# Allegro board pc042a_toplevel_22.brd
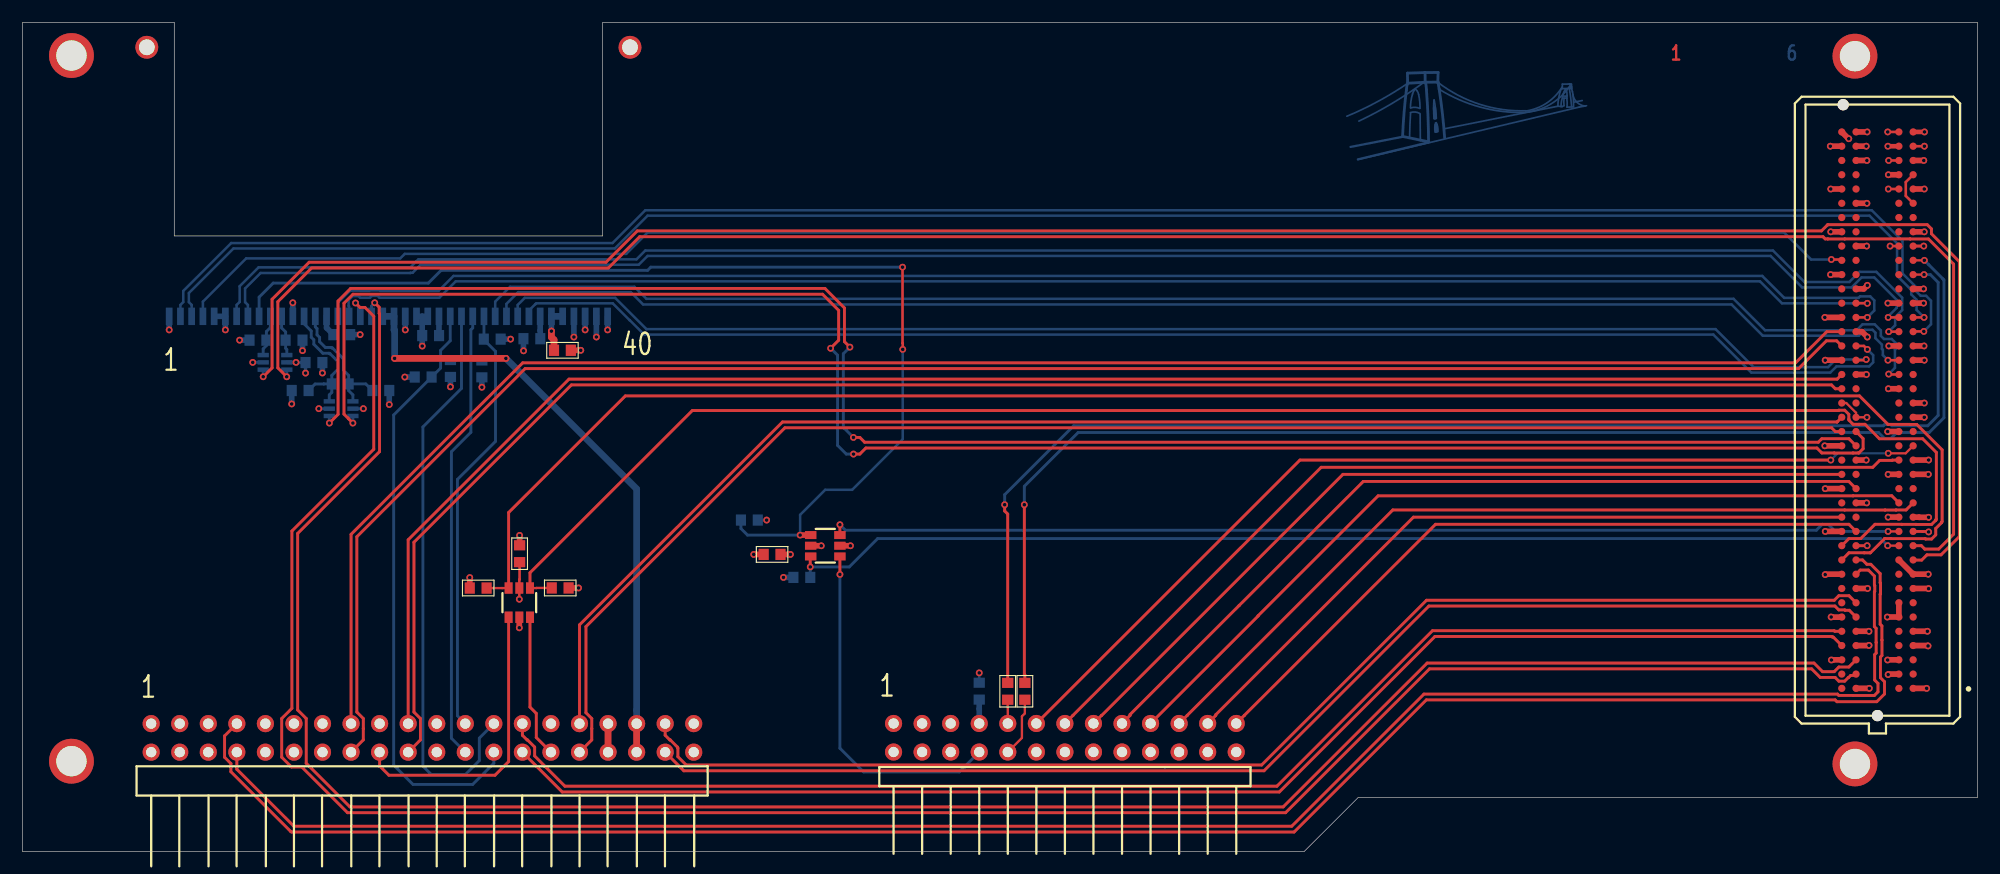
[diagram p0: board, top side]
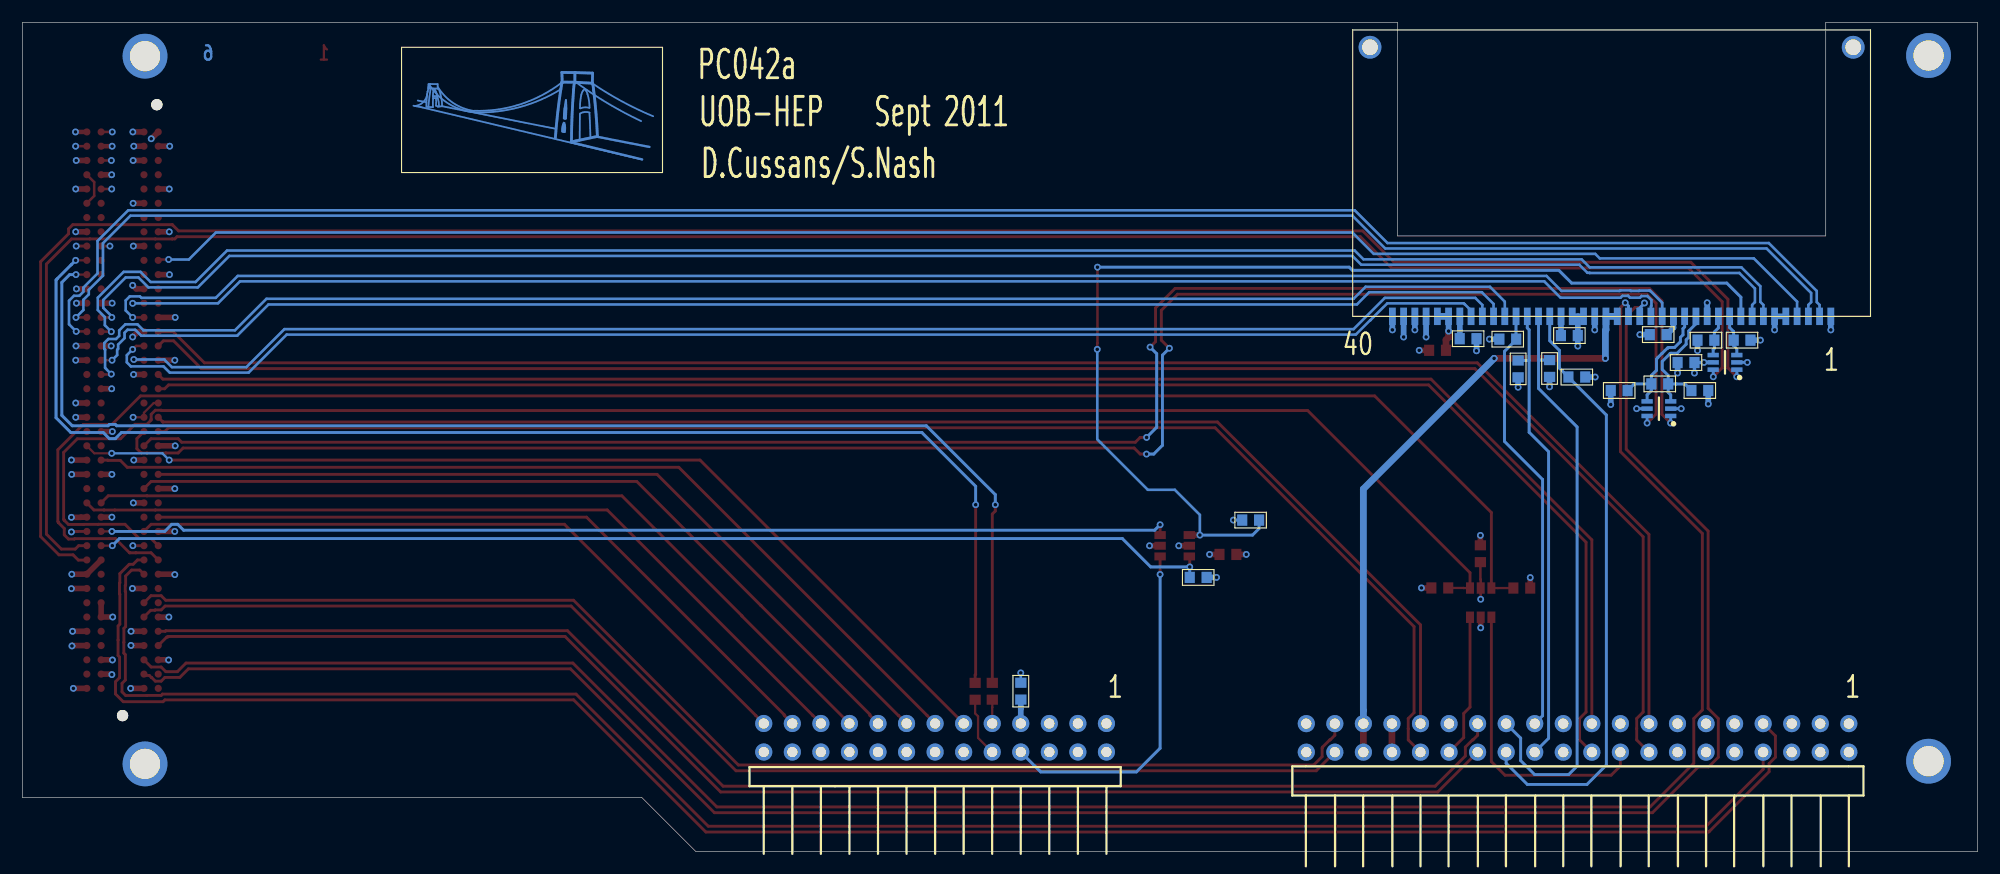
[diagram p1: board, bottom side, seen from below]

Outline 173.9 x 73.8 mm; copper layers: TOP, L2, L3, L4, L5, BOTTOM. Coordinates in mm from the lower left corner of the outline.
Outline path: 0,73.8 0,0 114,0 118.8,4.8 173.9,4.8 173.9,73.8 51.6,73.8 51.6,54.8 13.5,54.8 13.5,73.8 0,73.8

## Design rules (mm)
net group FMC_LA: nets FMC_LA<1> FMC_LA<2> FMC_LA<17> FMC_LA<18> FMC_LA<20> FMC_LA<24> FMC_LA<29> FMC_LA<30> FMC_LA<31> FMC_LA<32> FMC_LA<33> RDATA2 RDATA3 RDATA6 RDATA7
net group FMC_LA*: nets FMC_LA*<1> FMC_LA*<2> FMC_LA*<7> FMC_LA*<8> FMC_LA*<9> FMC_LA*<10> FMC_LA*<11> FMC_LA*<12> FMC_LA*<13> FMC_LA*<14> FMC_LA*<17> FMC_LA*<18> FMC_LA*<20> FMC_LA*<24> FMC_LA*<28> FMC_LA*<29> FMC_LA*<30> FMC_LA*<31> FMC_LA*<32> FMC_LA*<33>

## Placement (name value [footprint] x y rotation side)
C3  100nF  [C0603]  48.03 44.62 180 top
C4  100nF  [C0603]  45.31 45.65 0 bottom
C5  100nF  [C0603]  36.3 45.93 0 bottom
C6  100nF  [C0603]  28.4 46.01 180 bottom
C7  1.0uF  [C0603]  66.68 26.45 0 top
C8  100nF  [C0603]  25.93 43.53 180 bottom
C9  1.0uF  [C0603]  44.22 26.51 270 top
IC1  -  [SOP65P210X110-6N]  28.34 39.42 0 bottom
IC2  -  [SOP65P210X110-6N]  22.46 43.54 0 bottom
J1  -  [CONHE13C2X20M]  11.45 11.39 90 bottom
J2  -  [CONHE13C2X13M]  77.48 11.4 270 bottom
J3  -  [SAMTEC_ASP-134606-01]  165 39.29 270 top
LK1  -  [FXG_M2-7]  163 70.8 0 top
LK2  -  [FXG_M2-7]  163 7.8 0 top
LK3  -  [FXG_M2-7]  4.36 8.04 0 top
LK4  -  [FXG_M2-7]  4.36 70.86 0 top
NOREF  -  []  -15.12 -78.05 0 top
NOREF#2  -  []  128.6 65.3 0 top
NOREF#3  -  []  -0.03 0.01 89.9 top
NOREF#4  -  []  173.9 4.8 90 top
NOREF#5  -  []  0.03 73.8 0 top
R1  100  [C0603]  28.26 41.62 180 bottom
R2  390  [C0603]  31.87 41.04 0 bottom
R3  390  [C0603]  24.7 41.04 180 bottom
R4  10k  [C0603]  35.64 42.24 180 bottom
R5  10k  [C0603]  38.07 43 270 bottom
R6  10k  [C0603]  40.86 42.96 270 bottom
R7  10k  [C0603]  41.79 45.61 0 bottom
R8  00  [C0603]  85.1 14.28 90 bottom
R9  00  [C0603]  89.16 14.26 90 top
R10  00  [C0603]  87.63 14.26 90 top
R11  1k  [C0603]  69.32 24.4 180 bottom
R12  1k  [C0603]  40.54 23.45 180 top
R13  1k  [C0603]  47.83 23.46 0 top
R14  1k  [C0603]  64.66 29.5 0 bottom
R15  24  [C0603]  24.16 45.52 180 bottom
R16  24  [C0603]  20.95 45.52 0 bottom
U1  -  [SK_SAMTEC_MB1_140_01]  13.05 47.64 270 bottom
U2  -  [SOT23_6]  72.71 26.27 90 top
U3  -  [SOT23_6]  43.24 20.85 0 top

## Library data of the parts
C3-C6 C8 = CAPCERSMDCL2: part number: CAPCERSMDCL2_0603-100NF,16V; tolerance: 10%
C7 C9 = CAPCERSMDCL2: part number: CAPCERSMDCL2_0603-1.0UF,6.3V; tolerance: 10%
IC1 IC2 = ADCMP604: part number: ADCMP604BKSZ
J1 = CON40P: part number: CON40P-BARC2X20
J2 = CON26P: part number: CON26P-BARC2X13
J3 = CON160P_40CDGH: part number: ASP-134606-01
LK1-LK4 = 1-HOLE: part number: 1-HOLE_FXG2-7-BASE
R1 = RSMD0603: part number: RSMD0603_1/10W-100,1%; tolerance: 1%
R2 R3 = RSMD0603: part number: RSMD0603_1/10W-390,1%; tolerance: 1%
R4-R7 = RSMD0603: part number: RSMD0603_1/10W-10K,1%; tolerance: 1%
R8-R10 = RSMD0603: part number: RSMD0603_-00,
R11-R14 = RSMD0603: part number: RSMD0603_1/10W-1K,1%; tolerance: 1%
R15 R16 = RSMD0603: part number: RSMD0603_1/10W-24,1%; tolerance: 1%
U1 = SK-SAMTEC-40PIN-MB1: part number: SK-SAMTEC-40PIN-MB1_RT-SMT-SAMTEC
U2 U3 = SN74AUC2G07: part number: SN74AUC2G07_SOT-TI

## Footprints (pads in the part's own frame, mm; a bottom-side part is the same pattern mirrored in y, then rotated)
C0603
  rect 0.9x1 smd: 1(-0.75,0) 2(0.75,0)
CONHE13C2X13M
  round 1.524 hole 0.914: 1(0,0) 2(2.54,0) 3(0,-2.54) 4(2.54,-2.54) 5(0,-5.08) 6(2.54,-5.08) 7(0,-7.62) 8(2.54,-7.62) 9(0,-10.16) 10(2.54,-10.16) 11(0,-12.7) 12(2.54,-12.7) 13(0,-15.24) 14(2.54,-15.24) 15(0,-17.78) 16(2.54,-17.78) 17(0,-20.32) 18(2.54,-20.32) 19(0,-22.86) 20(2.54,-22.86) 21(0,-25.4) 22(2.54,-25.4) 23(0,-27.94) 24(2.54,-27.94) 25(0,-30.48) 26(2.54,-30.48)
CONHE13C2X20M
  round 1.524 hole 0.914: 1(0,0) 2(-2.54,0) 3(0,2.54) 4(-2.54,2.54) 5(0,5.08) 6(-2.54,5.08) 7(0,7.62) 8(-2.54,7.62) 9(0,10.16) 10(-2.54,10.16) 11(0,12.7) 12(-2.54,12.7) 13(0,15.24) 14(-2.54,15.24) 15(0,17.78) 16(-2.54,17.78) 17(0,20.32) 18(-2.54,20.32) 19(0,22.86) 20(-2.54,22.86) 21(0,25.4) 22(-2.54,25.4) 23(0,27.94) 24(-2.54,27.94) 25(0,30.48) 26(-2.54,30.48) 27(0,33.02) 28(-2.54,33.02) 29(0,35.56) 30(-2.54,35.56) 31(0,38.1) 32(-2.54,38.1) 33(0,40.64) 34(-2.54,40.64) 35(0,43.18) 36(-2.54,43.18) 37(0,45.72) 38(-2.54,45.72) 39(0,48.26) 40(-2.54,48.26)
FXG_M2-7
  round 3.988 hole 2.692: 1(0,0)
SAMTEC_ASP-134606-01
  round 1 hole 1.3 unplated: (-27.19,-3.05) (27.19,0)
  round 0.64 smd: C1(24.765,3.175) C2(23.495,3.175) C3(22.225,3.175) C4(20.955,3.175) C5(19.685,3.175) C6(18.415,3.175) C7(17.145,3.175) C8(15.875,3.175) C9(14.605,3.175) C10(13.335,3.175) C11(12.065,3.175) C12(10.795,3.175) C13(9.525,3.175) C14(8.255,3.175) C15(6.985,3.175) C16(5.715,3.175) C17(4.445,3.175) C18(3.175,3.175) C19(1.905,3.175) C20(0.635,3.175) C21(-0.635,3.175) C22(-1.905,3.175) C23(-3.175,3.175) C24(-4.445,3.175) C25(-5.715,3.175) C26(-6.985,3.175) C27(-8.255,3.175) C28(-9.525,3.175) C29(-10.795,3.175) C30(-12.065,3.175) C31(-13.335,3.175) C32(-14.605,3.175) C33(-15.875,3.175) C34(-17.145,3.175) C35(-18.415,3.175) C36(-19.685,3.175) C37(-20.955,3.175) C38(-22.225,3.175) C39(-23.495,3.175) C40(-24.765,3.175) D1(24.765,1.905) D2(23.495,1.905) D3(22.225,1.905) D4(20.955,1.905) D5(19.685,1.905) D6(18.415,1.905) D7(17.145,1.905) D8(15.875,1.905) D9(14.605,1.905) D10(13.335,1.905) D11(12.065,1.905) D12(10.795,1.905) D13(9.525,1.905) D14(8.255,1.905) D15(6.985,1.905) D16(5.715,1.905) D17(4.445,1.905) D18(3.175,1.905) D19(1.905,1.905) D20(0.635,1.905) D21(-0.635,1.905) D22(-1.905,1.905) D23(-3.175,1.905) D24(-4.445,1.905) D25(-5.715,1.905) D26(-6.985,1.905) D27(-8.255,1.905) D28(-9.525,1.905) D29(-10.795,1.905) D30(-12.065,1.905) D31(-13.335,1.905) D32(-14.605,1.905) D33(-15.875,1.905) D34(-17.145,1.905) D35(-18.415,1.905) D36(-19.685,1.905) D37(-20.955,1.905) D38(-22.225,1.905) D39(-23.495,1.905) D40(-24.765,1.905) G1(24.765,-1.905) G2(23.495,-1.905) G3(22.225,-1.905) G4(20.955,-1.905) G5(19.685,-1.905) G6(18.415,-1.905) G7(17.145,-1.905) G8(15.875,-1.905) G9(14.605,-1.905) G10(13.335,-1.905) G11(12.065,-1.905) G12(10.795,-1.905) G13(9.525,-1.905) G14(8.255,-1.905) G15(6.985,-1.905) G16(5.715,-1.905) G17(4.445,-1.905) G18(3.175,-1.905) G19(1.905,-1.905) G20(0.635,-1.905) G21(-0.635,-1.905) G22(-1.905,-1.905) G23(-3.175,-1.905) G24(-4.445,-1.905) G25(-5.715,-1.905) G26(-6.985,-1.905) G27(-8.255,-1.905) G28(-9.525,-1.905) G29(-10.795,-1.905) G30(-12.065,-1.905) G31(-13.335,-1.905) G32(-14.605,-1.905) G33(-15.875,-1.905) G34(-17.145,-1.905) G35(-18.415,-1.905) G36(-19.685,-1.905) G37(-20.955,-1.905) G38(-22.225,-1.905) G39(-23.495,-1.905) G40(-24.765,-1.905) H1(24.765,-3.175) H2(23.495,-3.175) H3(22.225,-3.175) H4(20.955,-3.175) H5(19.685,-3.175) H6(18.415,-3.175) H7(17.145,-3.175) H8(15.875,-3.175) H9(14.605,-3.175) H10(13.335,-3.175) H11(12.065,-3.175) H12(10.795,-3.175) H13(9.525,-3.175) H14(8.255,-3.175) H15(6.985,-3.175) H16(5.715,-3.175) H17(4.445,-3.175) H18(3.175,-3.175) H19(1.905,-3.175) H20(0.635,-3.175) H21(-0.635,-3.175) H22(-1.905,-3.175) H23(-3.175,-3.175) H24(-4.445,-3.175) H25(-5.715,-3.175) H26(-6.985,-3.175) H27(-8.255,-3.175) H28(-9.525,-3.175) H29(-10.795,-3.175) H30(-12.065,-3.175) H31(-13.335,-3.175) H32(-14.605,-3.175) H33(-15.875,-3.175) H34(-17.145,-3.175) H35(-18.415,-3.175) H36(-19.685,-3.175) H37(-20.955,-3.175) H38(-22.225,-3.175) H39(-23.495,-3.175) H40(-24.765,-3.175)
SK_SAMTEC_MB1_140_01
  round 2.032 hole 1.4: (-23.952,-40.99) (-23.952,1.99)
  rect 1.55x0.6 smd: 1(0,0) 2(0,-1) 3(0,-2) 4(0,-3) 5(0,-4) 6(0,-5) 7(0,-6) 8(0,-7) 9(0,-8) 10(0,-9) 11(0,-10) 12(0,-11) 13(0,-12) 14(0,-13) 15(0,-14) 16(0,-15) 17(0,-16) 18(0,-17) 19(0,-18) 20(0,-19) 21(0,-20) 22(0,-21) 23(0,-22) 24(0,-23) 25(0,-24) 26(0,-25) 27(0,-26) 28(0,-27) 29(0,-28) 30(0,-29) 31(0,-30) 32(0,-31) 33(0,-32) 34(0,-33) 35(0,-34) 36(0,-35) 37(0,-36) 38(0,-37) 39(0,-38) 40(0,-39)
SOP65P210X110-6N
  rect 1x0.4 smd: 1(-1.05,0.65) 2(-1.05,0) 3(-1.05,-0.65) 4(1.05,-0.65) 5(1.05,0) 6(1.05,0.65)
SOT23_6
  rect 0.711x1.016 smd: 1(0,0) 2(0.95,0) 3(1.9,0) 4(1.9,2.6) 5(0.95,2.6) 6(0,2.6)

## Nets
GND_SIGNAL: C3.1(A<0>) C4.1(A<0>) C5.1(A<0>) C6.1(A<0>) C7.1(A<0>) C8.1(A<0>) C9.1(A<0>) IC1.2(VEE) IC2.2(VEE) J1.2(A<1>) J1.5(A<4>) J1.6(A<5>) J1.9(A<8>) J1.10(A<9>) J1.13(A<12>) J1.14(A<13>) J2.6(A<5>) J2.12(A<11>) J2.14(A<13>) J2.16(A<15>) J2.18(A<17>) J2.20(A<19>) J2.22(A<21>) J2.24(A<23>) J2.26(A<25>) J3.C1(C<1>) J3.C4(C<4>) J3.C5(C<5>) J3.C8(C<8>) J3.C9(C<9>) J3.C12(C<12>) J3.C13(C<13>) J3.C16(C<16>) J3.C17(C<17>) J3.C20(C<20>) J3.C21(C<21>) J3.C24(C<24>) J3.C25(C<25>) J3.C28(C<28>) J3.C29(C<29>) J3.C32(C<32>) J3.C33(C<33>) J3.C36(C<36>) J3.C38(C<38>) J3.C40(C<40>) J3.D2(D<2>) J3.D3(D<3>) J3.D6(D<6>) J3.D7(D<7>) J3.D10(D<10>) J3.D13(D<13>) J3.D16(D<16>) J3.D19(D<19>) J3.D22(D<22>) J3.D25(D<25>) J3.D28(D<28>) J3.D37(D<37>) J3.D39(D<39>) J3.G1(G<1>) J3.G4(G<4>) J3.G5(G<5>) J3.G8(G<8>) J3.G11(G<11>) J3.G14(G<14>) J3.G17(G<17>) J3.G20(G<20>) J3.G23(G<23>) J3.G26(G<26>) J3.G29(G<29>) J3.G32(G<32>) J3.G35(G<35>) J3.G38(G<38>) J3.G40(G<40>) J3.H3(H<3>) J3.H6(H<6>) J3.H9(H<9>) J3.H12(H<12>) J3.H15(H<15>) J3.H18(H<18>) J3.H21(H<21>) J3.H24(H<24>) J3.H27(H<27>) J3.H30(H<30>) J3.H33(H<33>) J3.H36(H<36>) J3.H39(H<39>) LK1.1(A<0>) LK2.1(A<0>) LK3.1(A<0>) LK4.1(A<0>) R15.1(A<0>) R16.1(A<0>) U1.1(A<0>) U1.5(A<4>) U1.6(A<5>) U1.12(A<11>) U1.23(A<22>) U1.24(A<23>) U1.37(A<36>) U1.38(A<37>) U1.39(A<38>) U1.40(A<39>) U2.2 U3.2
P1V5A: J1.35(A<34>) J1.36(A<35>) U1.20(A<19>) U1.21(A<20>)
P2V5: C7.2(B<0>) C8.2(B<0>) IC2.5(VCC) J3.G39(G<39>) J3.H40(H<40>) R11.2(B<0>) R12.2(B<0>) R13.2(B<0>) U2.5
P3V3: C9.2(B<0>) J3.C39(C<39>) J3.D32(D<32>) J3.D36(D<36>) J3.D38(D<38>) J3.D40(D<40>) R8.2(B<0>) R14.2(B<0>) U3.5
P5V: J1.17(A<16>)
P12V: J3.C35(C<35>) J3.C37(C<37>)
A0: J1.23(A<22>) R7.1(A<0>) U1.29(A<28>)
A1: J1.24(A<23>) R6.1(A<0>) U1.28(A<27>)
A1+: J1.12(A<11>)
A1-: J1.11(A<10>)
A2: J1.25(A<24>) R5.1(A<0>) U1.27(A<26>)
A2+: J1.4(A<3>)
A2-: J1.3(A<2>)
A3: J1.26(A<25>) R4.1(A<0>) U1.26(A<25>)
BIAS: J1.40(A<39>)
BIAS_GND: J1.39(A<38>)
CA1+: IC2.3(+IN) R16.2(B<0>) U1.10(A<9>)
CA1-: IC2.4(-IN) R15.2(B<0>) U1.11(A<10>)
CCLK_ROC+: J3.G2(G<2>) U1.18(A<17>)
CCLK_ROC-: J3.G3(G<3>) U1.19(A<18>)
CCLK_SEL: J3.H31(H<31>) U1.4(A<3>)
CCTR+: J3.G27(G<27>) U1.16(A<15>)
CCTR-: J3.G28(G<28>) U1.17(A<16>)
CI2C_CLK+: J3.C26(C<26>) U1.2(A<1>)
CI2C_CLK-: J3.C27(C<27>) U1.3(A<2>)
CI2C_DAT+: J3.D23(D<23>) U1.30(A<29>)
CI2C_DAT-: J3.D24(D<24>) U1.31(A<30>)
CRESET*: R14.1(A<0>) U1.9(A<8>) U2.4(Y)
CTIN+: J3.D26(D<26>) U1.7(A<6>)
CTIN-: J3.D27(D<27>) U1.8(A<7>)
CTOUT+: J3.G24(G<24>) U1.32(A<31>)
CTOUT-: J3.G25(G<25>) U1.33(A<32>)
CTRIGOUT+: IC1.3(+IN) R1.2(B<0>) R3.1(A<0>) U1.13(A<12>)
CTRIGOUT-: IC1.4(-IN) R1.1(A<0>) R2.1(A<0>) U1.14(A<13>)
DP0_C2M: J3.C2(C<2>)
DP0_C2M*: J3.C3(C<3>)
DP0_M2C: J3.C6(C<6>)
DP0_M2C*: J3.C7(C<7>)
FA1+: IC2.1(Q) J3.C10(C<10>)
FA1-: IC2.6(Q*) J3.C11(C<11>)
FCLK_SEL_IN: J3.H10(H<10>) R12.1(A<0>) U3.6(Y)
FMC_LA*<1>: J3.D9(D<9>)
FMC_LA*<2>: J3.H8(H<8>)
FMC_LA*<7>: J3.H14(H<14>)
FMC_LA*<8>: J3.G13(G<13>)
FMC_LA*<9>: J3.D15(D<15>)
FMC_LA*<10>: J3.C15(C<15>)
FMC_LA*<11>: J3.H17(H<17>)
FMC_LA*<12>: J3.G16(G<16>)
FMC_LA*<13>: J3.D18(D<18>)
FMC_LA*<14>: J3.C19(C<19>)
FMC_LA*<17>: J3.D21(D<21>)
FMC_LA*<18>: J3.C23(C<23>)
FMC_LA*<20>: J3.G22(G<22>)
FMC_LA*<24>: J3.H29(H<29>)
FMC_LA*<28>: J3.H32(H<32>)
FMC_LA*<29>: J3.G31(G<31>)
FMC_LA*<30>: J3.H35(H<35>)
FMC_LA*<31>: J3.G34(G<34>)
FMC_LA*<32>: J3.H38(H<38>)
FMC_LA*<33>: J3.G37(G<37>)
FMC_LA<1>: J3.D8(D<8>)
FMC_LA<2>: J3.H7(H<7>)
FMC_LA<17>: J3.D20(D<20>)
FMC_LA<18>: J3.C22(C<22>)
FMC_LA<20>: J3.G21(G<21>)
FMC_LA<24>: J3.H28(H<28>)
FMC_LA<29>: J3.G30(G<30>)
FMC_LA<30>: J3.H34(H<34>)
FMC_LA<31>: J3.G33(G<33>)
FMC_LA<32>: J3.H37(H<37>)
FMC_LA<33>: J3.G36(G<36>)
FMC_PRSNT_M2C_L: J3.H2(H<2>)
FMC_PWR_GOOD_FLASH_RST_B: J3.D1(D<1>)
FMC_TCK_BUF: J3.D29(D<29>)
FMC_TDO: J3.D31(D<31>)
FMC_TMS_BUF: J3.D33(D<33>)
FPGA_TDO: J3.D30(D<30>)
FPON: J3.D11(D<11>) R11.1(A<0>) U2.6(Y)
FRESET_IN*: J3.H11(H<11>) R13.1(A<0>) U3.4(Y)
FRESET_OUT*: J3.D12(D<12>) U2.3(A)
FTRIGOUT+: IC1.1(Q) J3.G18(G<18>)
FTRIGOUT-: IC1.6(Q*) J3.G19(G<19>)
GA0: J3.C34(C<34>)
GA1: J3.D35(D<35>)
GBTCLK0_M2C: J3.D4(D<4>)
GBTCLK0_M2C*: J3.D5(D<5>)
IIC_SCL_MAIN: J3.C30(C<30>) R10.2(B<0>)
IIC_SDA_MAIN: J3.C31(C<31>) R9.2(B<0>)
RCLK_ROC+: J1.28(A<27>) J3.H4(H<4>)
RCLK_ROC-: J1.27(A<26>) J3.H5(H<5>)
RCLK_SEL: J1.18(A<17>) U3.1(A)
RCTR+: J1.32(A<31>) J3.H19(H<19>)
RCTR-: J1.31(A<30>) J3.H20(H<20>)
RDATA0: J2.11(A<10>) J3.C18(C<18>)
RDATA1: J2.13(A<12>) J3.D17(D<17>)
RDATA2: J2.15(A<14>) J3.H16(H<16>)
RDATA3: J2.17(A<16>) J3.G15(G<15>)
RDATA4: J2.19(A<18>) J3.D14(D<14>)
RDATA5: J2.21(A<20>) J3.C14(C<14>)
RDATA6: J2.23(A<22>) J3.H13(H<13>)
RDATA7: J2.25(A<24>) J3.G12(G<12>)
RI2C_CLK+: J1.22(A<21>)
RI2C_CLK-: J1.21(A<20>)
RI2C_DAT+: J1.38(A<37>) J3.G6(G<6>)
RI2C_DAT-: J1.37(A<36>) J3.G7(G<7>)
RPON: J2.8(A<7>) U2.1(A)
RRESET*: J1.30(A<29>) U3.3(A)
RTIN+: J1.20(A<19>) J3.H22(H<22>)
RTIN-: J1.19(A<18>) J3.H23(H<23>)
RTOUT+: J1.16(A<15>) J3.H25(H<25>)
RTOUT-: J1.15(A<14>) J3.H26(H<26>)
RTRIGOUT+: J1.8(A<7>) J3.G9(G<9>)
RTRIGOUT-: J1.7(A<6>) J3.G10(G<10>)
SUPPLY_1: C3.2(B<0>) IC1.5(VCC) J1.33(A<32>) J1.34(A<33>) R2.2(B<0>) R3.2(B<0>) R4.2(B<0>) R5.2(B<0>) R6.2(B<0>) R7.2(B<0>) U1.22(A<21>) U1.35(A<34>) U1.36(A<35>)
TRST_L: J3.D34(D<34>)
UNNAMED_2_CAPCERSMDCL2_I501_B: C6.2(B<0>) U1.15(A<14>)
UNNAMED_2_CAPCERSMDCL2_I503_B: C5.2(B<0>) U1.25(A<24>)
UNNAMED_2_CAPCERSMDCL2_I505_B: C4.2(B<0>) U1.34(A<33>)
UNNAMED_3_CON26P_I485_A: J2.9(A<8>) R10.1(A<0>)
UNNAMED_3_CON26P_I485_A_1: J2.10(A<9>) R9.1(A<0>)
UNNAMED_3_CON26P_I485_A_2: J2.7(A<6>) R8.1(A<0>)
VREF_A_M2C: J3.H1(H<1>)

Pads without a net: J1 1 29; J2 1 2 3 4 5

## Via types
v1: diameter 0.61, hole 0.33, TOP to BOTTOM, 141 vias

## Routing (per net, layer and track width the routed paths; a pad name or vN(x,y) marks a point on that pad's centre or on a via; arc(x,y) is an arc through that point)
GND_SIGNAL: length 329.1
  TOP w0.2: v1(164.06,38.66) 163.09,38.66 163.09,39.06 162.23,39.92 161.82,39.92
  TOP w0.257: v1(169.55,28.45) 169.51,28.49 169.02,28.49 169.01,28.5 J3.C12 ; 168.18,53.89 v1(169.12,53.89) ; J3.G11 v1(164.08,27.23)
  TOP w0.4: 168.18,64.06 v1(169.18,64.06) ; J3.D39 v1(165.93,62.78)
  TOP w0.5: 168.18,55.16 v1(169.16,55.16) ; J3.H27 v1(160.32,47.54) ; J3.H24 v1(160.35,43.73) ; 166.91,37.38 v1(165.91,37.38) ; C7.1 v1(65.05,26.45) ; 166.91,33.57 v1(165.95,33.57) ; v1(164.1,45.8) 163.62,46.27 163.09,46.27 ; J3.G17 v1(164,34.84) ; v1(169.51,24.69) J3.C9 166.91,25.96 ; 166.91,41.2 v1(165.97,41.2) ; U3.2 v1(44.19,19.91) ; 168.18,61.52 v1(169.12,61.52) ; J3.D37 v1(165.97,60.24) ; J3.H33 v1(160.85,55.16) ; v1(164.1,50.4) 163.78,50.08 163.09,50.08 ; 163.09,57.7 v1(164.06,57.7) ; v1(169.55,34.85) 169.54,34.84 J3.C17 ; v1(165.95,15.75) 166,15.79 166.91,15.79 ; v1(165.9,17.05) 165.91,17.07 166.91,17.07 ; 163.09,64.06 v1(164.08,64.06) ; v1(160.35,32.3) 160.35,32.3 161.82,32.3 ; v1(160.88,20.88) 160.99,20.88 161,20.86 161.71,20.86 161.73,20.88 161.82,20.88 ; 163.09,61.52 v1(164.06,61.52) ; J3.G14 v1(164.04,31.04) ; C3.1 v1(49.66,44.62) ; v1(169.55,29.75) 168.71,29.75 168.7,29.76 168.18,29.76 J3.C13 ; 168.18,23.41 169.53,23.41 v1(169.55,23.4) ; 161.82,28.5 v1(160.35,28.5) ; 161.82,17.07 161.05,17.07 161.03,17.05 v1(160.9,17.05) ; v1(165.88,20.88) 166.91,20.88 166.91,22.14 ; J3.C1 v1(169.38,14.52) ; J3.H30 v1(160.83,51.35) ; J3.H36 v1(160.85,58.97) ; 166.91,29.77 v1(165.95,29.77) ; J3.G5 v1(164.25,19.61) ; J3.C5 v1(169.44,19.61) ; 168.18,58.97 v1(169.16,58.97) ; J3.D28 v1(165.93,48.81) ; 168.18,48.81 v1(169.1,48.81) ; J3.G4 164.24,18.34 v1(164.25,18.35) ; v1(160.35,24.65) 160.38,24.69 161.82,24.69 ; J3.H39 v1(160.81,62.78) ; J3.C4 169.47,18.34 v1(169.5,18.3) ; U2.2 v1(73.65,27.22) ; J3.C24 v1(169.16,43.73) ; 163.09,42.46 v1(164.02,42.46) ; C9.1 v1(44.22,28.14) ; 168.18,45 v1(169.14,45) ; J3.G1 v1(164.28,14.52) ; J3.D25 v1(166.01,45) ; 161.82,36.12 v1(160.32,36.12) ; 168.18,50.08 v1(169.1,50.08) ; J3.C16 v1(169.53,33.57) ; 163.09,23.41 v1(164.12,23.41) ; 168.18,38.66 v1(169.16,38.66) ; 163.09,53.89 v1(164.04,53.89) ; J3.C21 v1(169.16,39.92)
  L2 w0.226: 2.43,6.12 LK3.1 ; LK3.1 6.28,9.97 ; LK3.1 7.01,8.04 ; LK3.1 4.36,5.39 ; LK3.1 6.28,6.12 ; LK3.1 2.43,9.97 ; LK3.1 1.71,8.04 ; LK3.1 4.36,10.69 ; J2.22 102.88,10.05 ; J2.22 101.99,7.97 ; J2.22 101.99,9.75 ; J2.22 104.07,8.86 ; J2.22 102.88,7.67 ; J2.22 103.78,9.75 ; J2.22 103.78,7.97 ; J2.22 101.69,8.86 ; 15.63,10.49 J1.5 ; J1.5 17.42,10.49 ; J1.5 15.34,11.39 ; J1.5 16.53,10.2 ; J1.5 15.63,12.28 ; J1.5 17.42,12.28 ; J1.5 16.53,12.58 ; J1.5 17.72,11.39 ; 96.91,9.75 J2.18 ; J2.18 97.8,10.05 ; J2.18 96.91,7.97 ; J2.18 96.61,8.86 ; J2.18 98.99,8.86 ; J2.18 98.7,9.75 ; J2.18 97.8,7.67 ; J2.18 98.7,7.97 ; 91.53,8.86 J2.14 ; J2.14 92.72,7.67 ; J2.14 93.62,7.97 ; J2.14 93.91,8.86 ; J2.14 93.62,9.75 ; J2.14 91.83,7.97 ; J2.14 92.72,10.05 ; J2.14 91.83,9.75 ; 95.26,7.67 J2.16 ; J2.16 95.26,10.05 ; J2.16 94.07,8.86 ; J2.16 96.16,7.97 ; J2.16 96.16,9.75 ; J2.16 94.37,9.75 ; J2.16 96.45,8.86 ; J2.16 94.37,7.97 ; J2.12 91.08,9.75 ; J2.12 91.37,8.86 ; J2.12 91.08,7.97 ; J2.12 89.29,9.75 ; J2.12 90.18,10.05 ; J2.12 89.29,7.97 ; J2.12 90.18,7.67 ; J2.12 88.99,8.86 ; 163,68.15 LK1.1 ; LK1.1 161.07,68.88 ; LK1.1 161.07,72.72 ; LK1.1 165.65,70.8 ; LK1.1 164.93,72.72 ; LK1.1 160.35,70.8 ; LK1.1 164.93,68.88 ; J2.24 106.32,9.75 ; J2.24 104.53,7.97 ; J2.24 104.53,9.75 ; J2.24 104.23,8.86 ; J2.24 106.32,7.97 ; J2.24 105.42,10.05 ; J2.24 106.61,8.86 ; J2.24 105.42,7.67 ; J2.6 83.46,9.75 ; J2.6 82.56,10.05 ; J2.6 83.75,8.86 ; J2.6 81.37,8.86 ; J2.6 82.56,7.67 ; J2.6 81.67,7.97 ; J2.6 81.67,9.75 ; J2.6 83.46,7.97 ; J1.6 17.42,7.95 ; J1.6 15.63,9.74 ; J1.6 17.72,8.85 ; J1.6 16.53,10.04 ; J1.6 16.53,7.66 ; J1.6 15.63,7.95 ; J1.6 17.42,9.74 ; J1.6 15.34,8.85 ; LK4.1 7.01,70.86 ; LK4.1 1.71,70.86 ; LK4.1 2.43,72.78 ; LK4.1 6.28,72.78 ; LK4.1 2.43,68.93 ; LK4.1 6.28,68.93 ; LK4.1 4.36,68.21 ; 99.45,9.75 J2.20 ; J2.20 101.24,7.97 ; J2.20 99.15,8.86 ; J2.20 101.24,9.75 ; J2.20 100.34,10.05 ; J2.20 100.34,7.67 ; J2.20 99.45,7.97 ; J2.20 101.53,8.86 ; J1.14 27.58,7.95 ; J1.14 27.88,8.85 ; J1.14 26.69,10.04 ; J1.14 27.58,9.74 ; J1.14 25.79,9.74 ; J1.14 25.5,8.85 ; J1.14 25.79,7.95 ; J1.14 26.69,7.66 ; LK2.1 163,10.45 ; LK2.1 164.93,5.88 ; LK2.1 164.93,9.72 ; LK2.1 161.07,9.72 ; LK2.1 165.65,7.8 ; LK2.1 161.07,5.88 ; LK2.1 160.35,7.8 ; J1.10 22.5,7.95 ; J1.10 20.71,9.74 ; J1.10 20.42,8.85 ; J1.10 21.61,7.66 ; J1.10 22.8,8.85 ; J1.10 21.61,10.04 ; J1.10 22.5,9.74 ; J1.10 20.71,7.95 ; 26.69,10.2 J1.13 ; J1.13 25.5,11.39 ; J1.13 25.79,12.28 ; J1.13 26.69,12.58 ; J1.13 25.79,10.49 ; J1.13 27.58,12.28 ; J1.13 27.88,11.39 ; J1.13 27.58,10.49 ; 20.71,12.28 J1.9 ; J1.9 20.71,10.49 ; J1.9 21.61,12.58 ; J1.9 22.8,11.39 ; J1.9 21.61,10.2 ; J1.9 22.5,10.49 ; J1.9 22.5,12.28 ; J1.9 20.42,11.39 ; J1.2 12.34,9.74 ; J1.2 12.34,7.95 ; J1.2 12.64,8.85 ; J1.2 11.45,10.04 ; J1.2 11.45,7.66 ; J1.2 10.26,8.85 ; J1.2 10.55,7.95 ; J1.2 10.55,9.74 ; J2.26 108.86,9.75 ; J2.26 107.07,7.97 ; J2.26 107.96,7.67 ; J2.26 106.77,8.86 ; J2.26 107.07,9.75 ; J2.26 108.86,7.97 ; J2.26 109.15,8.86 ; J2.26 107.96,10.05
  BOTTOM w0.257: IC2.2 v1(20.48,43.54) ; IC1.2 v1(26.36,39.42)
  BOTTOM w0.5: C8.1 v1(26.68,42.6) ; v1(35.55,44.99) C5.1 35.55,47.64 ; U1.38 v1(50.05,46.43) ; U1.1 v1(13.05,46.43) ; 35.55,47.64 U1.24 ; 35.55,47.64 U1.23 ; v1(18.05,46.43) U1.6 U1.5 ; v1(24.05,48.85) 24.05,48.79 24.05,48.79 U1.12 ; v1(44.57,44.57) 44.56,44.58 C4.1 ; R15.1 v1(24.91,44.59) ; v1(49.05,45.8) U1.37 ; U1.40 v1(52.05,46.43) ; C6.1 v1(30.03,46.01) ; U1.39 v1(51.05,45.8) ; R16.1 v1(19.31,45.52)
P1V5A: length 54.5
  TOP w0.6: v1(43,43.9) v1(33.1,43.9) ; J1.36 J1.35
  BOTTOM w0.6: U1.20 U1.21 33.05,46.44 33.1,46.39 v1(33.1,43.9) ; v1(43,43.9) 54.63,32.27 54.63,12.58 54.63,12.57 J1.35
P2V5: length 8.9
  TOP w0.5: 163.09,62.78 v1(164,62.78) ; R13.2 v1(49.46,23.46) ; v1(162.45,63.45) 162.43,63.45 161.82,64.06 ; C7.2 v1(68.31,26.45) ; U2.5 v1(71.05,27.22) ; R12.2 v1(39.79,24.39)
  BOTTOM w0.3: v1(25.18,42.59) C8.2 24.35,43.53 v1(24.33,43.54) IC2.5
  BOTTOM w0.5: R11.2 v1(67.69,24.4)
P3V3: length 9.6
  TOP w0.226: C9.2 44.22,24.23 44.19,24.2 U3.5 v1(44.19,22.46) ; J3.D32 v1(166.12,53.89) ; 166.91,64.06 v1(165.92,64.06) ; 168.18,62.78 v1(169.17,62.78) ; J3.D38 v1(165.99,61.52) ; J3.D36 v1(165.96,58.97)
  BOTTOM w0.226: R14.2 v1(66.19,29.5) ; R8.2 v1(85.1,15.9)
P12V: length 3.1
  TOP w0.226: 168.18,57.7 167.52,58.36 167.52,59.59 168.18,60.24
A0: length 38.4
  BOTTOM w0.257: U1.29 41.05,45.62 R7.1 41.04,45.56 42.08,44.52 42.08,36.51 38.69,33.12 38.69,12.09 J1.23
A1: length 41.1
  BOTTOM w0.257: U1.28 40.05,46.61 39.88,46.45 39.88,43.71 ; 39.88,43.71 39.88,37.32 38.15,35.59 38.15,10.08 J1.24 ; 39.88,43.71 R6.1
A2: length 52.1
  BOTTOM w0.257: 39.05,43.76 39.04,43.75 R5.1 ; 39.05,43.76 39.05,41.23 35.62,37.8 35.62,7.6 36.37,6.85 39.39,6.85 40.64,8.1 40.64,10.1 J1.25 ; 39.05,43.76 U1.27
A3: length 53.4
  BOTTOM w0.2: 36.39,42.24 R4.1
  BOTTOM w0.257: U1.26 38.05,45.47 37.19,44.61 37.19,43.03 33.01,38.86 33.01,7.7 34.74,5.97 40.04,5.97 41.93,7.86 J1.26
CA1+: length 3.7
  BOTTOM w0.257: U1.10 22.05,46.64 21.7,46.29 R16.2 21.7,45.04 21.41,44.75 IC2.3
CA1-: length 3.6
  BOTTOM w0.257: U1.11 23.05,46.61 23.41,46.25 R15.2 23.41,44.79 23.51,44.69 IC2.4
CCLK_ROC+: length 194.2
  TOP w0.257: 163.09,15.79 162.97,15.67 162.62,15.67 162.43,15.48 162.4,15.48 162.09,15.17 161.56,15.17 161.23,15.5 159.91,15.5 159.14,16.26 125.16,16.26 112.35,3.46 28.91,3.46 24.84,7.53 23.92,7.53 23.06,8.39 23.06,11.84 23.96,12.74 23.96,28.53 31.25,35.81 31.25,47.65 30.46,48.43 30.02,48.43 v1(29.63,48.83)
  BOTTOM w0.257: v1(29.63,48.83) 29.63,48.8 30.05,48.37 U1.18
CCLK_ROC-: length 191.3
  TOP w0.257: J3.G3 162.45,16.42 161.56,16.42 161.15,16.01 160.12,16.01 159.35,16.78 124.94,16.78 112.14,3.97 29.13,3.97 25.24,7.86 25.24,11.84 24.48,12.6 24.48,28.32 31.76,35.6 31.76,47.86 31.73,47.89 31.73,48.45 v1(31.33,48.85)
  BOTTOM w0.257: v1(31.33,48.85) 31.33,48.84 31.05,48.56 U1.19
CCLK_SEL: length 150.7
  TOP w0.226: J3.H31 161.75,52.7 v1(160.9,52.7)
  BOTTOM w0.226: U1.4 16.05,48.95 19.9,52.8 33.6,52.8 34,53.2 53.7,53.2 55.6,55.1 156.7,55.1 159.1,52.7 v1(160.9,52.7)
CCTR+: length 142.7
  TOP w0.226: v1(164.1,47.54) 163.09,47.54
  BOTTOM w0.226: v1(164.1,47.54) 164.72,48.16 164.72,49.06 164.36,49.42 163.45,49.42 163.32,49.28 156.71,49.28 154.75,51.24 38.34,51.24 37,49.9 31.84,49.9 31.79,49.95 30.88,49.95 30.83,49.9 30.11,49.9 30.08,49.93 29.17,49.93 29.14,49.9 29.1,49.9 28.05,48.85 U1.16
CCTR-: length 139.3
  TOP w0.226: 163.09,48.81 164.09,48.81 v1(164.1,48.8)
  BOTTOM w0.226: U1.17 29.05,48.53 29.01,48.57 29.01,49.09 29.37,49.45 29.88,49.45 30.03,49.3 30.91,49.3 31.08,49.47 31.59,49.47 31.75,49.3 37.08,49.3 38.54,50.76 154.55,50.76 156.51,48.8 v1(164.1,48.8)
CI2C_CLK+: length 170
  TOP w0.226: 168.18,46.27 168.2,46.3 v1(169.12,46.3)
  BOTTOM w0.226: v1(169.12,46.3) 169.76,46.94 169.76,49.03 169.32,49.47 168.85,49.47 168.48,49.83 168.48,50.12 168.48,50.12 168.48,50.2 167.22,51.46 167.22,54.35 164.49,57.08 55.4,57.08 52.48,54.17 18.57,54.17 14.3,49.9 14.3,48.91 14.05,48.66 U1.2
CI2C_CLK-: length 166.6
  TOP w0.226: 168.15,47.54 v1(169.15,47.54)
  BOTTOM w0.226: v1(169.15,47.54) 168.48,48.21 168.48,49.12 168,49.6 168,50 166.74,51.26 166.74,54.15 164.29,56.6 55.6,56.6 52.68,53.68 18.77,53.68 14.8,49.72 14.8,48.9 15.05,48.66 U1.3
CI2C_DAT+: length 133.2
  TOP w0.226: J3.D23 166.03,42.46 v1(166,42.5)
  BOTTOM w0.226: v1(166,42.5) 166.55,43.05 166.55,44.67 166.63,44.75 166.63,45.26 166.27,45.62 165.58,45.62 165.3,45.9 165.3,46.38 164.76,46.93 163.67,46.93 163.14,46.4 155,46.4 152.2,49.2 55.5,49.2 54.43,50.27 43.37,50.27 42.05,48.95 U1.30
CI2C_DAT-: length 129.1
  TOP w0.226: v1(165.94,43.73) J3.D24
  BOTTOM w0.226: U1.31 43.05,48.75 44.09,49.79 54.11,49.79 55.2,48.7 152.02,48.7 154.8,45.92 163.34,45.92 163.87,46.44 164.56,46.44 164.82,46.18 164.82,45.7 165.39,45.12 165.39,44.75 165.48,44.66 165.48,44.19 v1(165.94,43.73)
CRESET*: length 96.3
  TOP w0.226: v1(78.3,44.7) 78.3,45.24 78.28,45.26 v1(78.28,52.02)
  TOP w0.5: U2.4 v1(69.17,28.17)
  BOTTOM w0.226: v1(69.17,28.17) 69.17,29.97 71.4,32.2 73.8,32.2 78.3,36.7 v1(78.3,44.7)
  BOTTOM w0.257: U1.9 21.05,49.35 22.3,50.6 36.1,50.6 37.24,51.74 55.61,51.74 55.89,52.02 v1(78.28,52.02) ; R14.1 63.91,28.75 64.49,28.17 v1(69.17,28.17)
CTIN+: length 158.9
  TOP w0.226: v1(166,46.27) J3.D26
  BOTTOM w0.226: v1(166,46.27) 166.57,46.85 166.57,47.57 167.2,48.2 167.2,49.3 164.9,51.6 163.4,51.6 162.5,50.7 158.5,50.7 155.7,53.5 55.4,53.5 54.62,52.72 35.22,52.72 34.5,52 21,52 19.32,50.32 19.32,48.92 19.05,48.66 U1.7
CTIN-: length 155.9
  TOP w0.226: v1(165.96,47.54) J3.D27
  BOTTOM w0.226: v1(165.96,47.54) 166.09,47.68 166.09,47.77 166.72,48.4 166.72,49.1 164.72,51.1 163.58,51.1 162.7,50.22 158.3,50.22 155.5,53.02 55.6,53.02 54.82,52.23 35.42,52.23 34.7,51.52 34.52,51.52 34.5,51.5 21.18,51.5 19.8,50.12 19.8,48.9 20.05,48.66 U1.8
CTOUT+: length 125
  TOP w0.226: v1(164,43.8) 163.94,43.73 163.09,43.73
  BOTTOM w0.226: U1.32 44.05,48.66 44.68,49.28 52.72,49.28 55.5,46.5 150.6,46.5 153.98,43.12 160.61,43.12 161.29,43.8 v1(164,43.8)
CTOUT-: length 125.8
  TOP w0.226: v1(164.1,44.7) 163.79,45 163.09,45
  BOTTOM w0.226: v1(164.1,44.7) 164.62,44.18 164.62,43.54 164.26,43.18 161.35,43.18 160.81,42.63 153.78,42.63 150.4,46.02 55.3,46.02 54.02,47.3 54,47.3 52.5,48.8 45.7,48.8 45.63,48.73 45.62,48.73 45.05,48.16 U1.33
CTRIGOUT+: length 11.8
  BOTTOM w0.257: R1.2 27.51,40.87 27.29,40.65 IC1.3 ; R1.2 27.51,42.38 28.04,42.91 28.04,43.63 27.36,44.31 27.31,44.31 27.26,44.36 26.72,44.36 25.91,45.16 25.91,45.55 25.69,45.78 25.69,46.34 25.05,46.97 U1.13 ; R1.2 26.81,41.62 26.8,41.62 26.03,41.62 R3.1
CTRIGOUT-: length 11.7
  BOTTOM w0.257: U1.14 26.05,46.7 26.2,46.55 26.2,45.99 26.43,45.77 26.43,45.38 26.94,44.87 27.48,44.87 27.52,44.83 27.57,44.83 28.05,44.35 28.06,44.35 28.45,43.96 28.45,43.95 28.56,43.84 28.56,42.84 29.01,42.38 R1.1 ; R1.1 30.53,41.62 31.12,41.04 R2.1 ; R1.1 29.01,41.03 29.39,40.65 IC1.4
FA1+: length 191.8
  TOP w0.257: 168.18,25.96 168.19,25.94 168.93,25.94 169.4,26.41 170.66,26.41 172.29,28.04 172.29,52.5 169.8,54.99 169.8,55.43 169.43,55.8 160.58,55.8 160.55,55.77 160.54,55.77 160.02,55.24 54.69,55.24 51.9,52.46 25.5,52.46 22.2,49.16 22.2,43.05 v1(21.41,42.26)
  BOTTOM w0.257: IC2.1 v1(21.41,42.26)
FA1-: length 188.4
  TOP w0.257: v1(23.5,42.26) 22.72,43.05 22.72,48.95 25.71,51.94 52.11,51.94 54.9,54.73 160.15,54.73 160.35,54.53 160.58,54.53 160.58,54.53 162.09,54.53 162.09,54.53 167.91,54.53 167.91,54.53 169.54,54.53 171.77,52.29 171.77,28.25 170.44,26.92 169.21,26.92 168.9,27.23 J3.C11
  BOTTOM w0.257: v1(23.5,42.26) 23.5,42.89 IC2.6
FCLK_SEL_IN: length 159.6
  TOP w0.2: R12.1 42.66,23.45 42.66,23.45 U3.6
  TOP w0.257: U3.6 43.24,30.18 53.62,40.56 163.4,40.56 165.94,38.02 167.91,38.02 167.91,38.02 168.49,38.02 170.75,35.76 170.75,29.37 170.7,29.32 170.7,29.27 170.18,28.76 170.18,28.19 169.81,27.82 169.29,27.82 169.25,27.85 166.18,27.85 166.17,27.86 165.65,27.86 165.63,27.85 165.63,27.85 164.38,26.6 164.35,26.6 164.34,26.59 163.82,26.59 163.81,26.6 162.47,26.6 161.82,25.96
FPON: length 100
  TOP w0.2: 166.91,27.23 v1(165.91,27.23)
  TOP w0.257: U2.6 70.07,26.23 v1(70.07,25.33)
  BOTTOM w0.257: v1(165.91,27.23) 165.28,27.86 76.07,27.86 73.54,25.33 v1(70.07,25.33) R11.1
FRESET_IN*: length 151.6
  TOP w0.2: U3.4 45.72,23.45 45.73,23.46 R13.1
  TOP w0.257: U3.4 45.14,24.82 59.58,39.25 161.54,39.25 161.56,39.28 162.09,39.28 162.45,38.92 162.45,38.48 162.47,38.47 162.47,38.39 162.83,38.03 163.36,38.03 163.36,38.03 163.89,38.03 165.18,36.74 169.02,36.74 170.24,35.53 170.24,29.58 170.19,29.53 170.19,29.49 169.81,29.11 168.44,29.11 168.44,29.12 167.17,29.12 167.16,29.13 164.78,29.13 163.51,27.86 162.46,27.86 161.82,27.23
FRESET_OUT*: length 95.8
  TOP w0.2: 166.91,28.5 v1(165.95,28.5)
  TOP w0.257: v1(72.71,29.09) U2.3
  BOTTOM w0.257: v1(165.95,28.5) 161.25,28.5 160.62,29.13 160.09,29.13 159.56,28.6 73.2,28.6 v1(72.71,29.09)
FTRIGOUT+: length 160.1
  TOP w0.257: v1(73.6,44.9) 73.11,45.39 73.11,48.39 71.38,50.12 29.19,50.12 28.07,49.01 28.07,38.91 v1(27.3,38.14) ; 163.09,36.12 162.46,36.75 160.05,36.75 159.74,36.43 74.91,36.43 74.48,36.86 v1(73.91,36.86)
  BOTTOM w0.257: v1(27.3,38.14) 27.3,38.36 27.29,38.37 IC1.1 ; v1(73.91,36.86) 73.01,37.76 73.01,44.31 v1(73.6,44.9)
FTRIGOUT-: length 163
  TOP w0.257: v1(73.92,35.38) 74.48,35.38 75.02,35.92 159.62,35.92 160.05,35.48 161.15,35.48 161.15,35.47 162.82,35.47 162.83,35.48 163.31,35.48 163.32,35.49 163.36,35.49 163.72,35.85 163.72,36.76 163.09,37.38 ; v1(29.39,38.14) 29.01,38.52 29.01,38.52 28.6,38.93 28.6,48.81 29.4,49.61 71.16,49.61 72.6,48.17 72.6,45.52 v1(71.88,44.8)
  BOTTOM w0.257: v1(71.88,44.8) 72.5,44.18 72.5,36.16 73.28,35.38 v1(73.92,35.38) ; v1(29.39,38.14) IC1.6
IIC_SCL_MAIN: length 117.3
  TOP w0.2: v1(169.14,51.35) 168.18,51.35
  TOP w0.257: v1(87.37,30.87) 87.37,30.31 87.63,30.04 R10.2
  BOTTOM w0.257: v1(87.37,30.87) 87.37,31.77 93.5,37.9 165.53,37.9 165.64,38.02 166.17,38.02 166.29,37.9 169.47,37.9 170.4,38.83 170.4,50.66 169.7,51.35 v1(169.14,51.35)
IIC_SDA_MAIN: length 118
  TOP w0.2: v1(169.17,52.62) 168.18,52.62
  TOP w0.257: R9.2 89.16,15.72 89.12,15.76 v1(89.12,30.87)
  BOTTOM w0.257: v1(169.17,52.62) 169.57,52.23 169.57,52.23 170.83,50.97 170.83,50.96 170.91,50.87 170.91,38.61 169.6,37.3 166.72,37.3 166.17,36.75 165.64,36.75 165.1,37.3 93.9,37.3 89.12,32.52 v1(89.12,30.87)
RCLK_ROC+: length 124.9
  TOP w0.257: J1.28 48.01,5.3 111.79,5.3 125.64,19.14 160.93,19.14 160.99,19.09 161.07,19.09 161.82,18.34
RCLK_ROC-: length 126.5
  TOP w0.257: 161.82,19.61 161.2,19.61 161.15,19.66 125.42,19.66 111.58,5.82 48.25,5.82 45.56,8.5 45.56,9.3 44.92,9.94 44.88,9.94 44.47,10.35 J1.27
RCLK_SEL: length 26.4
  TOP w0.257: J1.18 31.77,7.62 32.59,6.79 42.03,6.79 43.24,8.01 U3.1
RCTR+: length 131
  TOP w0.257: J1.32 50.64,9.93 50.64,10.93 50.64,10.93 50.64,11.84 50.12,12.36 50.12,20.02 67.82,37.72 160.91,37.72 161.25,37.38 161.82,37.38
RCTR-: length 128.7
  TOP w0.257: 161.82,38.66 161.42,38.25 161.41,38.25 161.4,38.23 67.6,38.23 49.55,20.18 J1.31
RDATA0: length 88.2
  TOP w0.2: 168.18,36.12 167.51,35.45 v1(165.96,35.45)
  TOP w0.257: v1(160.85,34.85) 113.63,34.85 J2.11
  BOTTOM w0.2: v1(160.85,34.85) 161.45,35.45 v1(165.96,35.45)
RDATA1: length 83.9
  TOP w0.257: J2.13 93.44,12.12 93.44,12.12 115.52,34.2 164.58,34.2 165.2,34.82 166.3,34.82 166.33,34.84 166.91,34.84
RDATA2: length 75.7
  TOP w0.257: 161.82,33.57 117.45,33.57 96,12.12 95.98,12.12 J2.15
RDATA3: length 74.5
  TOP w0.257: J2.17 98.52,12.12 98.52,12.2 108.22,21.9 108.22,21.9 119.27,32.95 162.45,32.95 J3.G15
RDATA4: length 75.2
  TOP w0.257: 166.91,31.04 166.27,31.67 162.83,31.67 162.82,31.66 120.58,31.66 109.9,20.98 109.9,20.96 J2.19
RDATA5: length 73.4
  TOP w0.257: J3.C14 167.55,30.41 166.65,30.41 166.65,30.4 165.69,30.4 165.68,30.4 162.09,30.4 162.08,30.41 121.89,30.41 103.6,12.12 103.6,12.12 J2.21
RDATA6: length 64
  TOP w0.257: J2.23 106.14,12.12 106.14,12.18 123.73,29.77 161.82,29.77
RDATA7: length 62.7
  TOP w0.257: J3.G12 162.46,29.13 125.69,29.13 108.68,12.12 108.68,12.12 J2.25
RI2C_DAT+: length 113.1
  TOP w0.257: J3.G6 162.5,21.48 162.12,21.48 162.09,21.51 161.56,21.51 161.22,21.85 125.1,21.85 110.43,7.19 58.82,7.19 J1.38
RI2C_DAT-: length 115
  TOP w0.257: J3.G7 162.47,22.77 161.56,22.77 161.16,22.37 124.88,22.37 110.22,7.7 59.04,7.7 58.3,8.44 58.3,9.22 58.26,9.26 58.26,9.3 57.62,9.94 57.58,9.94 57.17,10.35 J1.37
RPON: length 31.1
  TOP w0.257: U2.1 v1(72.71,24.67)
  BOTTOM w0.257: J2.8 83.33,7.09 74.82,7.09 72.71,9.19 v1(72.71,24.67)
RRESET*: length 12.8
  TOP w0.257: J1.30 45.7,10.15 45.7,12.3 45.14,12.86 U3.3
RTIN+: length 152.3
  TOP w0.257: 161.82,41.2 161.25,41.2 160.91,41.54 48.82,41.54 34.82,27.53 34.82,12.41 35.4,11.84 35.4,9.94 34.31,8.85
RTIN-: length 150
  TOP w0.257: 34.31,11.39 34.31,27.75 48.61,42.05 161.41,42.05 J3.H23
RTOUT+: length 159.4
  TOP w0.257: J1.16 30.32,9.94 30.32,10.93 30.32,10.93 30.32,11.84 29.74,12.41 29.74,28.02 44.71,42.99 157.99,42.99 160.46,45.46 161.37,45.46 J3.H25
RTOUT-: length 156.9
  TOP w0.257: J3.H26 160.49,46.27 157.72,43.5 44.5,43.5 29.23,28.23 J1.15
RTRIGOUT+: length 167.2
  TOP w0.257: J3.G9 163.46,25.05 164.19,25.05 164.73,24.52 164.73,23.71 164.76,23.68 164.76,23.15 164.73,23.12 164.73,20.02 164.88,19.87 164.88,18.62 164.89,18.61 164.89,17.66 164.75,17.53 164.75,15.26 165.05,14.97 165.05,14.21 164.72,13.89 162.83,13.89 162.82,13.9 161.56,13.9 161.45,14.01 124.66,14.01 112.9,2.25 24.14,2.25 19.07,7.32 J1.8
RTRIGOUT-: length 173.2
  TOP w0.257: 163.09,25.96 163.67,25.96 164.06,25.57 164.41,25.57 165.24,24.74 165.24,23.93 165.27,23.89 165.27,22.94 165.24,22.91 165.24,20.24 165.39,20.08 165.39,18.83 165.4,18.83 165.4,17.45 165.26,17.31 165.26,15.48 165.63,15.12 165.63,14.02 164.94,13.34 161.4,13.34 161.23,13.5 124.87,13.5 113.11,1.74 23.93,1.74 23.87,1.79 23.85,1.79 18.54,7.11 18.54,7.83 17.98,8.39 17.98,10.3 J1.7
SUPPLY_1: length 34.4
  TOP w0.6: J1.34 J1.33 ; v1(47.05,46.32) 47.05,45.78 47.28,45.55 C3.2
  L3 w0.226: J1.34 52.09,10.04 ; J1.34 53.28,8.85 ; J1.34 51.19,9.74 ; J1.34 51.19,7.95 ; J1.34 52.98,7.95 ; J1.34 50.9,8.85 ; J1.34 52.09,7.66 ; J1.34 52.98,9.74 ; 50.9,11.39 J1.33 ; J1.33 52.98,10.49 ; J1.33 52.09,10.2 ; J1.33 52.09,12.58 ; J1.33 52.98,12.28 ; J1.33 51.19,10.49 ; J1.33 53.28,11.39 ; J1.33 51.19,12.28
  BOTTOM w0.257: IC1.5 v1(30.32,39.42)
  BOTTOM w0.5: U1.35 v1(47.05,46.32) ; R2.2 v1(32.62,39.79) ; R6.2 v1(40.86,41.33) ; R3.2 v1(23.95,39.84) ; R7.2 v1(43.42,45.61) ; U1.22 v1(34.05,46.43) ; R4.2 v1(34.01,42.24) ; R5.2 v1(38.07,41.36)
  BOTTOM w0.6: U1.35 U1.36
UNNAMED_2_CAPCERSMDCL2_I501_B: length 1.9
  BOTTOM w0.5: U1.15 27.05,46.62 C6.2
UNNAMED_2_CAPCERSMDCL2_I503_B: length 1.7
  BOTTOM w0.5: C5.2 37.05,45.93 U1.25
UNNAMED_2_CAPCERSMDCL2_I505_B: length 2
  BOTTOM w0.5: U1.34 46.05,46.38 46.05,46.37 C4.2
UNNAMED_3_CON26P_I485_A: length 2.1
  TOP w0.2: J2.9 87.64,12.83 87.63,12.84 R10.1
UNNAMED_3_CON26P_I485_A_1: length 5.3
  TOP w0.2: J2.10 88.9,10.12 88.9,12.03 89.16,12.29 R9.1
UNNAMED_3_CON26P_I485_A_2: length 2.1
  BOTTOM w0.5: R8.1 85.1,12.7 85.1,12.7 J2.7

## Copper pours and planes (outline as drawn; the poured copper is in the pictures)
GND_SIGNAL on L2: 1,0.8 1,72.8 13.05,72.8 13.05,54.29 13.05,54.28 52.18,54.28 52.18,72.8 173,72.8 173,5.8 118.24,5.77 113.27,0.8 ; 1 cut-out
P2V5 on L5: 1,0.8 1,72.8 13.05,72.8 13.05,54.29 52.16,54.29 52.17,54.29 52.17,72.8 173,72.8 173,5.8 118.6,5.8 113.6,0.8 99.53,0.8 99.53,0.8 ; 1 cut-out
P3V3 on L4: 0.99,72.81 0.99,0.81 0.98,0.79 113.27,0.79 118.25,5.77 172.99,5.77 172.99,72.81 172.98,72.82 52.19,72.82 52.18,72.81 52.18,54.28 13.05,54.28 13.04,54.29 13.04,72.81 13.04,72.81 ; 1 cut-out
SUPPLY_1 on L3: 1,72.8 13.05,72.8 13.05,54.29 13.05,54.28 52.17,54.28 52.18,54.29 52.18,72.8 173,72.8 173,5.8 118.5,5.8 118.27,5.8 113.27,0.8 100,0.8 100,0.8 1,0.8 ; 1 cut-out

## Text on the board
BOTTOM: 6
Ref Des/Silkscreen Bottom: 1 | 40 | Sept 2011 | D.Cussans/S.Nash | UOB-HEP | PC042a
TOP: 1
Ref Des/Silkscreen Top: 1 | 40
L2: 2
L3: 3
L4: 4
L5: 5
DISPLAY_BOTTOM: FIGURE | SIZE | 0.3302 | 0.9144 | 1.4 | 2.6924 | 1.3 | DRILL CHART: TOP to BOTTOM | ALL UNITS ARE IN MILLIMETERS | PLATED | NON-PLATED | QTY | 126 | 66 | 2 | 4
